# EAGLE board SMPS GACUN - Copy (EAGLE 9.5.0), part 1 of 2
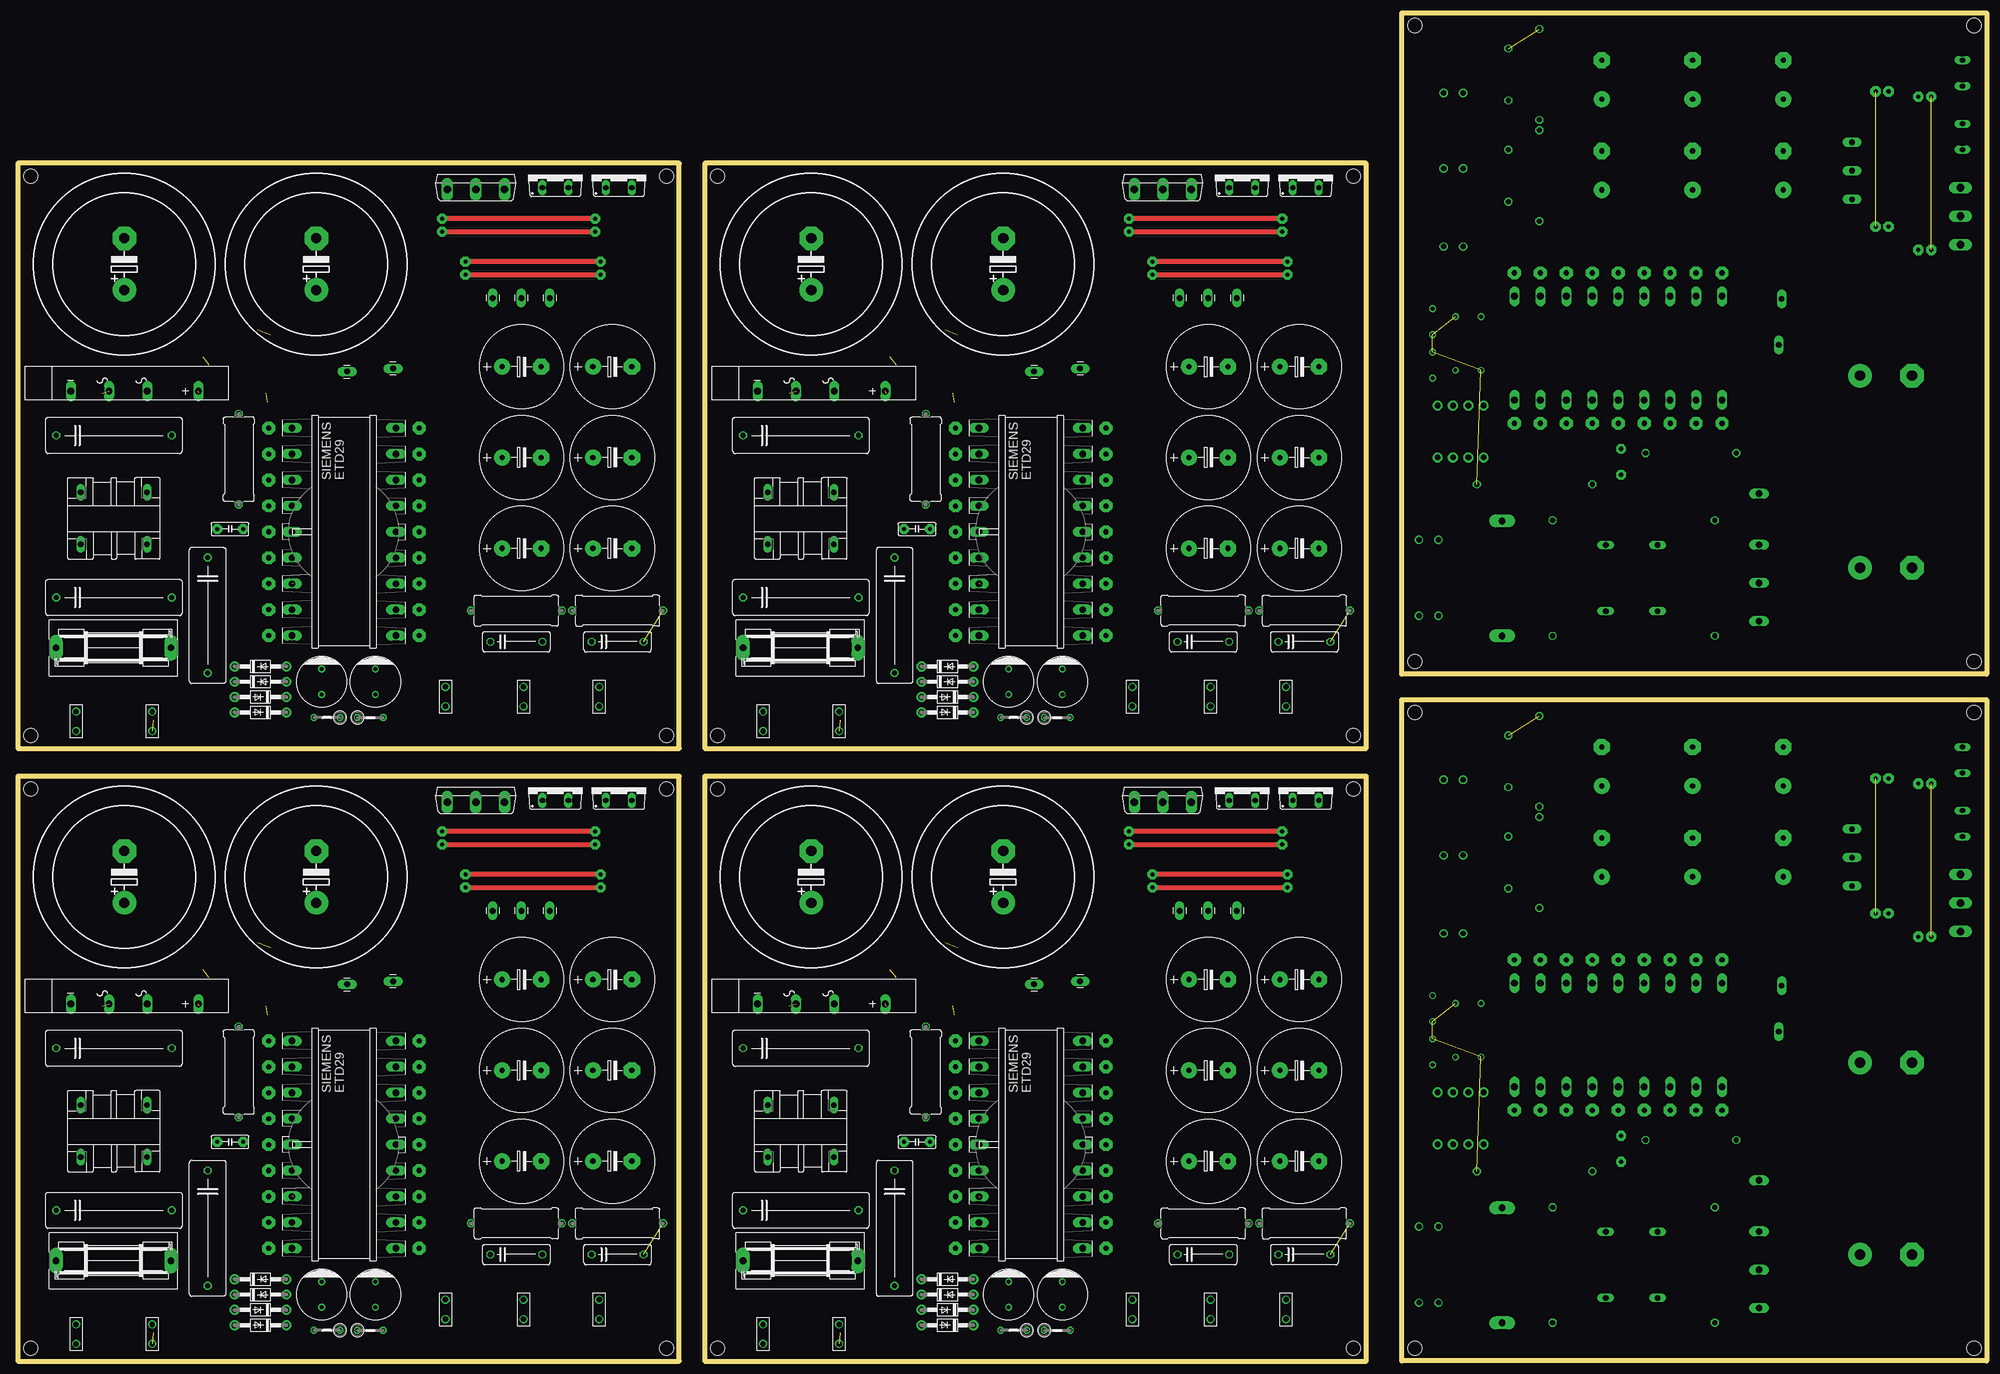
[diagram p0: board, top side]
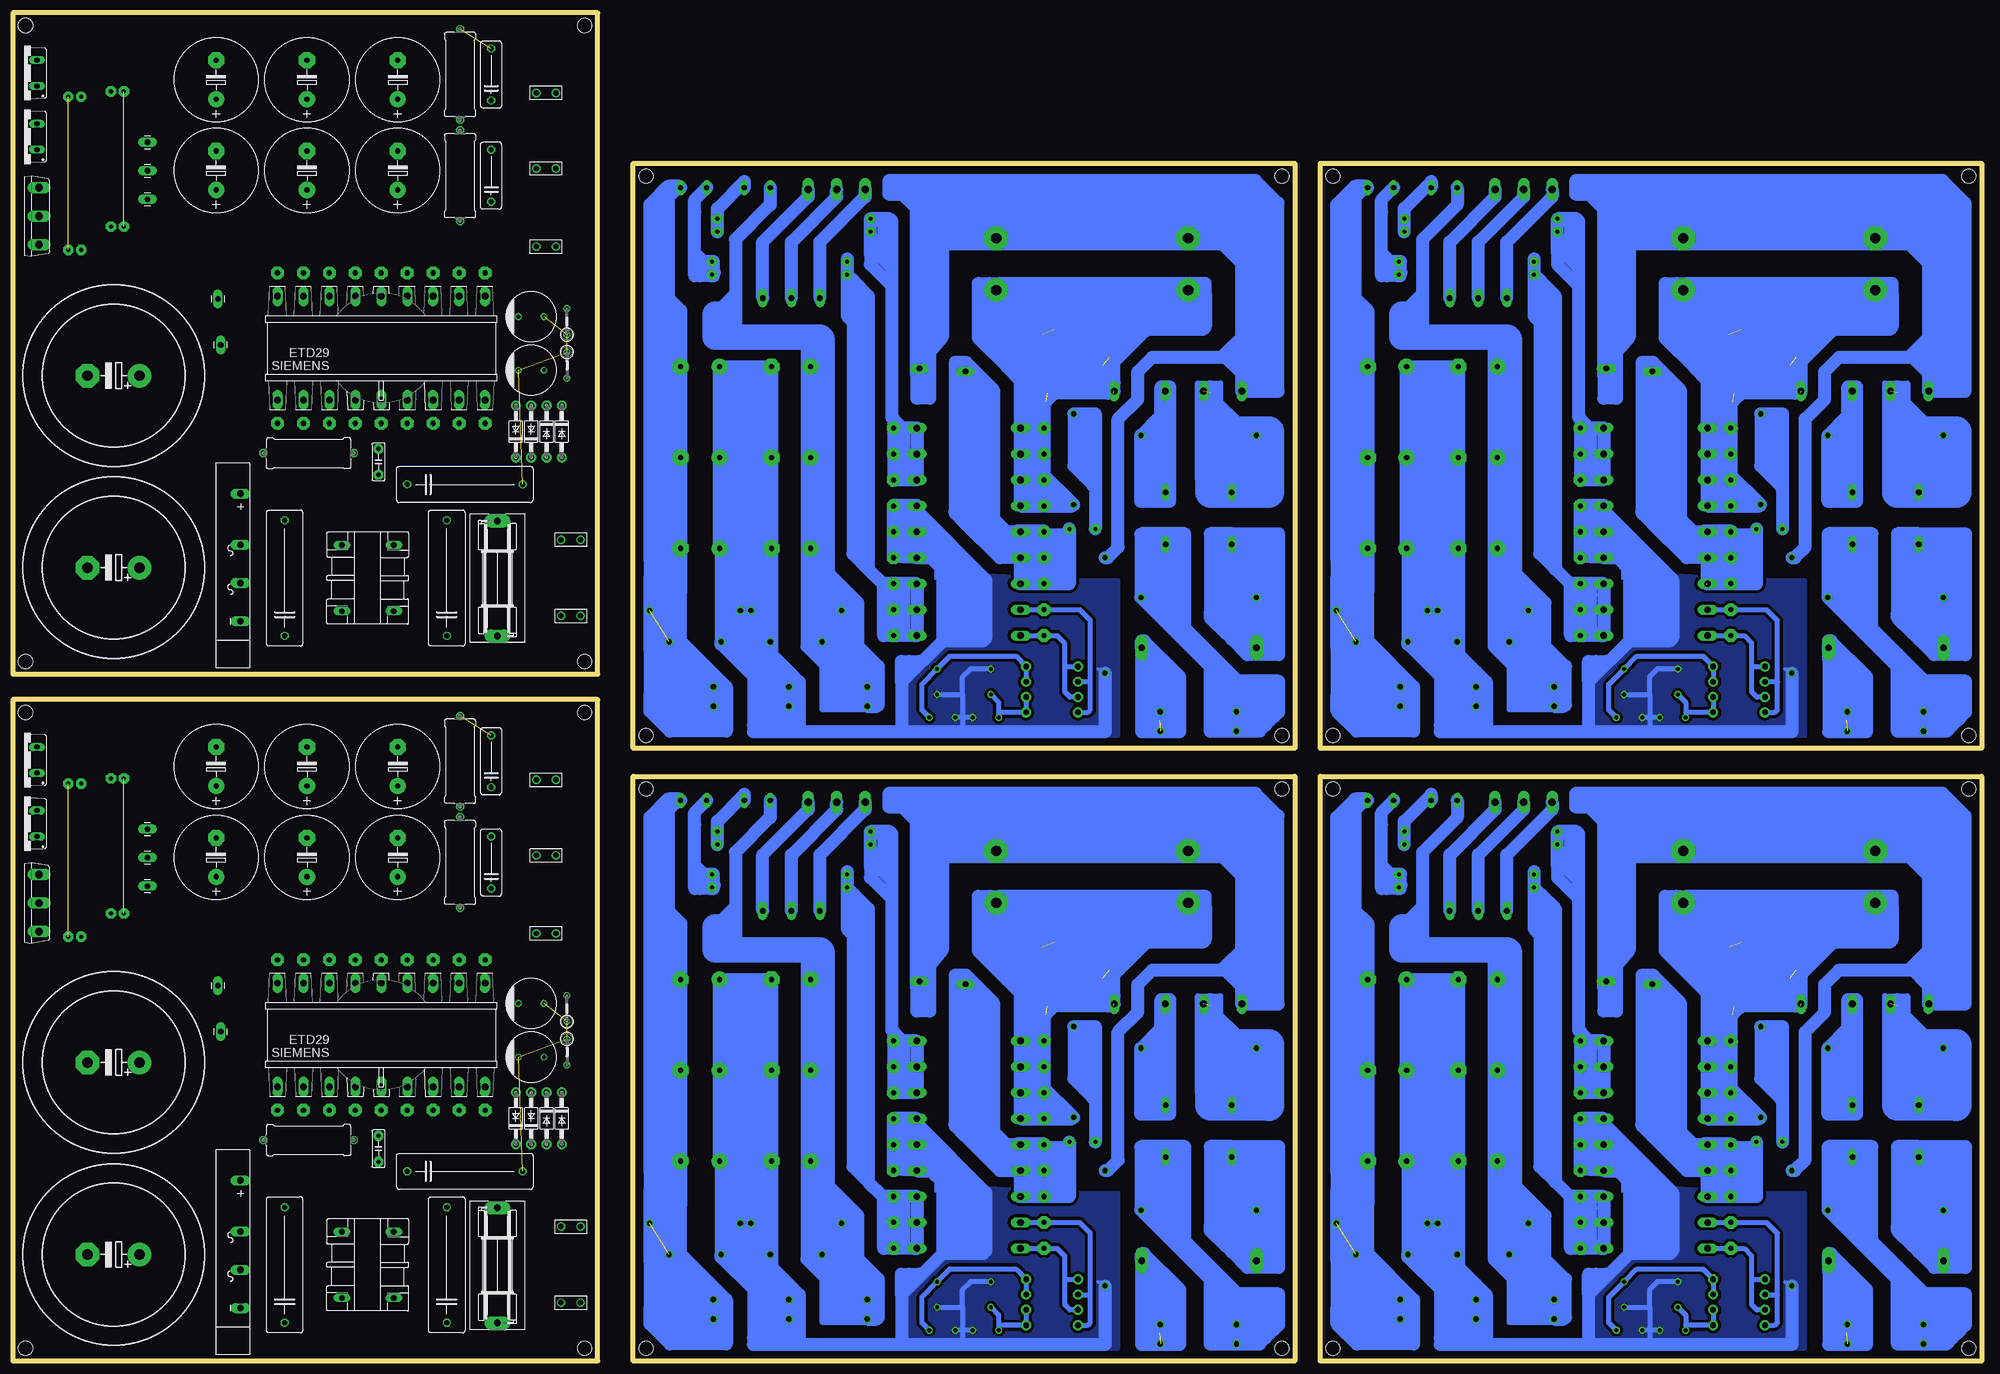
[diagram p1: board, bottom side, seen from below]

Size 385.5 x 264.05 mm. Coordinates in mm from the lower left corner, seen from the top.
Outline: 0,0 129.5,0 129.5,114.55 0,114.55 0,0
Outline: 134.5,0 264,0 264,114.55 134.5,114.55 134.5,0
Outline: 0,120 129.5,120 129.5,234.55 0,234.55 0,120
Outline: 134.5,120 264,120 264,234.55 134.5,234.55 134.5,120
Outline: 270.95,0.05 270.95,129.55 385.5,129.55 385.5,0.05 270.95,0.05
Outline: 270.95,134.55 270.95,264.05 385.5,264.05 385.5,134.55 270.95,134.55
Copper layers (1*16): Top 0.035mm / dielectric 1.5mm / Bottom 0.035mm
Design rules "default": minimum track width 6mil, minimum drill 0.35mm, track to track 24mil, track to pad 24mil, pad to pad 24mil, via to via 24mil, smd to smd 24mil, copper to edge 40mil, drill to drill 6mil, minimum pad ring 10mil, minimum via ring 8mil, stop-mask expansion 4mil, vias tented up to drill 0mil, thermal gap 10mil
Holes 2.8 mm at 127,2.55 127,112.05 2.5,112.05 2.5,2.55 261.5,2.55 261.5,112.05 137,112.05 137,2.55 127,122.55 127,232.05 2.5,232.05 2.5,122.55 261.5,122.55 261.5,232.05 137,232.05 137,122.55 383,127.05 273.5,127.05 273.5,2.55 383,2.55 383,261.55 273.5,261.55 273.5,137.05 383,137.05

## Footprints (pad centres in the part's own frame; a part is rotated, then mirrored left to right if it is on the bottom)
DSI32 = drill 1.321 long: + -14,1.5; - 10.994,1.5; AC1 -3.992,1.5; AC2 3.501,1.5
C225-074X268 = drill 1.016 octagon: 1 -11.303,0; 2 11.303,0
EB35D = drill 2.007 pad 4.597: + -5.08,0 | drill 2.007 pad 4.597 octagon: - 5.08,0
C050-025X075 = drill 0.813 pad 1.93 octagon: 1 -2.54,0; 2 2.54,0
E7,5-16 = drill 1.016 pad 3.15: + -3.81,0 | drill 1.016 pad 3.15 octagon: - 3.81,0
C102-043X133 = drill 1.016 octagon: 1 -5.08,0; 2 5.08,0
SANYO-OSCON_F13 = drill 0.8 pad 1.27: + 2.5,0; - -2.5,0
TO220ACS = drill 1.016 long: A 2.54,-2.54; C -2.54,-2.54
DO41-10 = drill 1.118 pad 1.93: A 5.08,0; C -5.08,0
SH22,5A = drill 1.321 pad 2.54 long: 1 -11.252,0; 2 11.252,0
1X01_LONGPAD = drill 1.118 pad 1.88 long: 1 0,0
1X02_BIG = drill 1.067: P$1 0,0; P$2 3.81,0
MFE = drill 1.118 long: 1 6.477,-5.08; 2 6.477,5.08; 3 -6.477,5.08; 4 -6.477,-5.08
ST-D4 = drill 1.321 long: 1 -15.24,10.16; 2 -15.24,-10.16; 3 -20.32,10.16; 4 -10.16,-10.16; 5 -5.08,10.16; 6 -25.4,10.16; 7 -20.32,-10.16; 8 -25.4,-10.16; 10 5.08,-10.16; 11 10.16,10.16; 12 10.16,-10.16; 13 15.24,10.16; 14 15.24,-10.16 | drill 1.321 pad 1.981 long: P$1 -10.16,10.16; P$2 0,10.16; P$3 5.08,10.16; P$4 0,-10.16; P$5 -5.08,-10.16
TO247BV = drill 1.499 long: D 0,-2.921; G -5.588,-2.921; S 5.588,-2.921
0617/17 = drill 1.016 octagon: 1 -8.89,0; 2 8.89,0
0207/5V = drill 0.813 octagon: 1 -2.54,0; 2 2.54,0

## Placement (x,y rotation side)
B1  RECTIFIER-DSI32  [DSI32]  21.34,71.45 180 top
B2  RECTIFIER-DSI32  [DSI32]  155.84,71.45 180 top
B3  RECTIFIER-DSI32  [DSI32]  21.34,191.45 180 top
B4  RECTIFIER-DSI32  [DSI32]  155.84,191.45 180 top
B5  RECTIFIER-DSI32  [DSI32]  342.4,21.39 270 bottom
B6  RECTIFIER-DSI32  [DSI32]  342.4,155.89 270 bottom
C1  [C225-074X268]  18.8,29.56 0 top
C2  [C225-074X268]  18.8,61.29 0 top
C3  [EB35D]  58.43,94.82 90 top
C4  [C050-025X075]  41.56,42.95 0 top
C5  [C225-074X268]  37.14,26.04 270 top
C6  [E7,5-16]  98.62,39.17 0 top
C7  [E7,5-16]  116.4,39.17 0 top
C8  [E7,5-16]  98.62,74.73 0 top
C9  [E7,5-16]  116.4,74.73 0 top
C10  [E7,5-16]  98.62,56.95 0 top
C11  [E7,5-16]  116.4,56.95 0 top
C12  [C102-043X133]  97.61,20.88 0 top
C13  [C102-043X133]  117.42,20.88 0 top
C14  [EB35D]  20.84,94.82 90 top
C15  [SANYO-OSCON_F13]  59.5,13.05 270 top
C16  [SANYO-OSCON_F13]  70,13.05 270 top
C17  [C225-074X268]  153.3,29.56 0 top
C18  [E7,5-16]  233.12,56.95 0 top
C19  [E7,5-16]  250.9,56.95 0 top
C20  [C102-043X133]  232.11,20.88 0 top
C21  [C102-043X133]  251.92,20.88 0 top
C22  [EB35D]  155.34,94.82 90 top
C23  [C225-074X268]  153.3,61.29 0 top
C24  [EB35D]  192.93,94.82 90 top
C25  [C050-025X075]  176.06,42.95 0 top
C26  [C225-074X268]  171.64,26.04 270 top
C27  [E7,5-16]  233.12,39.17 0 top
C28  [E7,5-16]  250.9,39.17 0 top
C29  [E7,5-16]  233.12,74.73 0 top
C30  [E7,5-16]  250.9,74.73 0 top
C31  [SANYO-OSCON_F13]  194,13.05 270 top
C32  [SANYO-OSCON_F13]  204.5,13.05 270 top
C33  [C225-074X268]  18.8,149.56 0 top
C34  [E7,5-16]  98.62,176.95 0 top
C35  [E7,5-16]  116.4,176.95 0 top
C36  [C102-043X133]  97.61,140.88 0 top
C37  [C102-043X133]  117.42,140.88 0 top
C38  [EB35D]  20.84,214.82 90 top
C39  [C225-074X268]  18.8,181.29 0 top
C40  [EB35D]  58.43,214.82 90 top
C41  [C050-025X075]  41.56,162.95 0 top
C42  [C225-074X268]  37.14,146.04 270 top
C43  [E7,5-16]  98.62,159.17 0 top
C44  [E7,5-16]  116.4,159.17 0 top
C45  [E7,5-16]  98.62,194.73 0 top
C46  [E7,5-16]  116.4,194.73 0 top
C47  [SANYO-OSCON_F13]  59.5,133.05 270 top
C48  [SANYO-OSCON_F13]  70,133.05 270 top
C49  [C225-074X268]  153.3,149.56 0 top
C50  [E7,5-16]  233.12,176.95 0 top
C51  [E7,5-16]  250.9,176.95 0 top
C52  [C102-043X133]  232.11,140.88 0 top
C53  [C102-043X133]  251.92,140.88 0 top
C54  [EB35D]  155.34,214.82 90 top
C55  [C225-074X268]  153.3,181.29 0 top
C56  [EB35D]  192.93,214.82 90 top
C57  [C050-025X075]  176.06,162.95 0 top
C58  [C225-074X268]  171.64,146.04 270 top
C59  [E7,5-16]  233.12,159.17 0 top
C60  [E7,5-16]  250.9,159.17 0 top
C61  [E7,5-16]  233.12,194.73 0 top
C62  [E7,5-16]  250.9,194.73 0 top
C63  [SANYO-OSCON_F13]  194,133.05 270 top
C64  [SANYO-OSCON_F13]  204.5,133.05 270 top
C65  [C225-074X268]  300.51,18.85 90 bottom
C66  [E7,5-16]  327.9,98.67 90 bottom
C67  [E7,5-16]  327.9,116.45 90 bottom
C68  [C102-043X133]  291.83,97.66 90 bottom
C69  [C102-043X133]  291.83,117.47 90 bottom
C70  [EB35D]  365.77,20.89 180 bottom
C71  [C225-074X268]  332.24,18.85 90 bottom
C72  [EB35D]  365.77,58.48 180 bottom
C73  [C050-025X075]  313.9,41.61 90 bottom
C74  [C225-074X268]  296.99,37.19 0 bottom
C75  [E7,5-16]  310.12,98.67 90 bottom
C76  [E7,5-16]  310.12,116.45 90 bottom
C77  [E7,5-16]  345.68,98.67 90 bottom
C78  [E7,5-16]  345.68,116.45 90 bottom
C79  [SANYO-OSCON_F13]  284,59.55 0 bottom
C80  [SANYO-OSCON_F13]  284,70.05 0 bottom
C81  [C225-074X268]  300.51,153.35 90 bottom
C82  [E7,5-16]  327.9,233.17 90 bottom
C83  [E7,5-16]  327.9,250.95 90 bottom
C84  [C102-043X133]  291.83,232.16 90 bottom
C85  [C102-043X133]  291.83,251.97 90 bottom
C86  [EB35D]  365.77,155.39 180 bottom
C87  [C225-074X268]  332.24,153.35 90 bottom
C88  [EB35D]  365.77,192.98 180 bottom
C89  [C050-025X075]  313.9,176.11 90 bottom
C90  [C225-074X268]  296.99,171.69 0 bottom
C91  [E7,5-16]  310.12,233.17 90 bottom
C92  [E7,5-16]  310.12,250.95 90 bottom
C93  [E7,5-16]  345.68,233.17 90 bottom
C94  [E7,5-16]  345.68,250.95 90 bottom
C95  [SANYO-OSCON_F13]  284,194.05 0 bottom
C96  [SANYO-OSCON_F13]  284,204.55 0 bottom
D1  BYT08P  [TO220ACS]  105.23,112.35 0 top
D2  BYT08P  [TO220ACS]  117.67,112.35 0 top
D3  1N4004  [DO41-10]  47.5,16.05 0 top
D4  1N4004  [DO41-10]  47.5,10.05 180 top
D5  1N4004  [DO41-10]  47.5,7.05 180 top
D6  1N4004  [DO41-10]  47.5,13.05 0 top
D7  BYT08P  [TO220ACS]  239.73,112.35 0 top
D8  BYT08P  [TO220ACS]  252.17,112.35 0 top
D9  1N4004  [DO41-10]  182,16.05 0 top
D10  1N4004  [DO41-10]  182,10.05 180 top
D11  1N4004  [DO41-10]  182,7.05 180 top
D12  1N4004  [DO41-10]  182,13.05 0 top
D13  BYT08P  [TO220ACS]  105.23,232.35 0 top
D14  BYT08P  [TO220ACS]  117.67,232.35 0 top
D15  1N4004  [DO41-10]  47.5,136.05 0 top
D16  1N4004  [DO41-10]  47.5,130.05 180 top
D17  1N4004  [DO41-10]  47.5,127.05 180 top
D18  1N4004  [DO41-10]  47.5,133.05 0 top
D19  BYT08P  [TO220ACS]  239.73,232.35 0 top
D20  BYT08P  [TO220ACS]  252.17,232.35 0 top
D21  1N4004  [DO41-10]  182,136.05 0 top
D22  1N4004  [DO41-10]  182,130.05 180 top
D23  1N4004  [DO41-10]  182,127.05 180 top
D24  1N4004  [DO41-10]  182,133.05 0 top
D25  BYT08P  [TO220ACS]  383.3,105.28 90 bottom
D26  BYT08P  [TO220ACS]  383.3,117.72 90 bottom
D27  1N4004  [DO41-10]  287,47.55 90 bottom
D28  1N4004  [DO41-10]  281,47.55 270 bottom
D29  1N4004  [DO41-10]  278,47.55 270 bottom
D30  1N4004  [DO41-10]  284,47.55 90 bottom
D31  BYT08P  [TO220ACS]  383.3,239.78 90 bottom
D32  BYT08P  [TO220ACS]  383.3,252.22 90 bottom
D33  1N4004  [DO41-10]  287,182.05 90 bottom
D34  1N4004  [DO41-10]  281,182.05 270 bottom
D35  1N4004  [DO41-10]  278,182.05 270 bottom
D36  1N4004  [DO41-10]  284,182.05 90 bottom
F1  [SH22,5A]  18.72,19.68 180 top
F2  [SH22,5A]  153.22,19.68 180 top
F3  [SH22,5A]  18.72,139.68 180 top
F4  [SH22,5A]  153.22,139.68 180 top
F5  [SH22,5A]  290.63,18.77 270 bottom
F6  [SH22,5A]  290.63,153.27 270 bottom
J1  [1X01_LONGPAD]  73.47,74.39 270 top
J2  [1X02_BIG]  11.41,3.39 90 top
J3  [1X02_BIG]  83.72,8.22 90 top
J4  [1X02_BIG]  26.3,3.39 90 top
J5  [1X01_LONGPAD]  64.47,73.82 90 top
J6  [1X01_LONGPAD]  104.15,88.19 0 top
J7  [1X01_LONGPAD]  92.97,88.19 0 top
J8  [1X01_LONGPAD]  98.56,88.19 0 top
J9  [1X02_BIG]  99.01,8.22 90 top
J10  [1X02_BIG]  113.81,8.22 90 top
J11  [1X02_BIG]  145.91,3.39 90 top
J12  [1X02_BIG]  160.8,3.39 90 top
J13  [1X01_LONGPAD]  207.97,74.39 270 top
J14  [1X01_LONGPAD]  198.97,73.82 90 top
J15  [1X01_LONGPAD]  238.65,88.19 0 top
J16  [1X01_LONGPAD]  227.47,88.19 0 top
J17  [1X01_LONGPAD]  233.06,88.19 0 top
J18  [1X02_BIG]  218.22,8.22 90 top
J19  [1X02_BIG]  233.51,8.22 90 top
J20  [1X02_BIG]  248.31,8.22 90 top
J21  [1X02_BIG]  11.41,123.39 90 top
J22  [1X02_BIG]  26.3,123.39 90 top
J23  [1X01_LONGPAD]  73.47,194.39 270 top
J24  [1X01_LONGPAD]  64.47,193.82 90 top
J25  [1X01_LONGPAD]  104.15,208.19 0 top
J26  [1X01_LONGPAD]  92.97,208.19 0 top
J27  [1X01_LONGPAD]  98.56,208.19 0 top
J28  [1X02_BIG]  83.72,128.22 90 top
J29  [1X02_BIG]  99.01,128.22 90 top
J30  [1X02_BIG]  113.81,128.22 90 top
J31  [1X02_BIG]  145.91,123.39 90 top
J32  [1X02_BIG]  160.8,123.39 90 top
J33  [1X01_LONGPAD]  207.97,194.39 270 top
J34  [1X01_LONGPAD]  198.97,193.82 90 top
J35  [1X01_LONGPAD]  238.65,208.19 0 top
J36  [1X01_LONGPAD]  227.47,208.19 0 top
J37  [1X01_LONGPAD]  233.06,208.19 0 top
J38  [1X02_BIG]  218.22,128.22 90 top
J39  [1X02_BIG]  233.51,128.22 90 top
J40  [1X02_BIG]  248.31,128.22 90 top
J41  [1X02_BIG]  274.34,11.46 180 bottom
J42  [1X02_BIG]  274.34,26.35 180 bottom
J43  [1X01_LONGPAD]  345.34,73.52 0 bottom
J44  [1X01_LONGPAD]  344.77,64.52 180 bottom
J45  [1X01_LONGPAD]  359.14,104.2 90 bottom
J46  [1X01_LONGPAD]  359.14,93.02 90 bottom
J47  [1X01_LONGPAD]  359.14,98.61 90 bottom
J48  [1X02_BIG]  279.17,83.77 180 bottom
J49  [1X02_BIG]  279.17,99.06 180 bottom
J50  [1X02_BIG]  279.17,113.86 180 bottom
J51  [1X02_BIG]  274.34,145.96 180 bottom
J52  [1X02_BIG]  274.34,160.85 180 bottom
J53  [1X01_LONGPAD]  345.34,208.02 0 bottom
J54  [1X01_LONGPAD]  344.77,199.02 180 bottom
J55  [1X01_LONGPAD]  359.14,238.7 90 bottom
J56  [1X01_LONGPAD]  359.14,227.52 90 bottom
J57  [1X01_LONGPAD]  359.14,233.11 90 bottom
J58  [1X02_BIG]  279.17,218.27 180 bottom
J59  [1X02_BIG]  279.17,233.56 180 bottom
J60  [1X02_BIG]  279.17,248.36 180 bottom
L1  MFE  [MFE]  18.8,45.05 0 top
L2  [ST-D4]  63.83,47.48 90 top
L3  MFE  [MFE]  153.3,45.05 0 top
L4  [ST-D4]  198.33,47.48 90 top
L5  MFE  [MFE]  18.8,165.05 0 top
L6  [ST-D4]  63.83,167.48 90 top
L7  MFE  [MFE]  153.3,165.05 0 top
L8  [ST-D4]  198.33,167.48 90 top
L9  MFE  [MFE]  316,18.85 90 bottom
L10  [ST-D4]  318.43,63.88 180 bottom
L11  MFE  [MFE]  316,153.35 90 bottom
L12  [ST-D4]  318.43,198.38 180 bottom
Q1  IRFPC40  [TO247BV]  89.67,112.35 0 top
Q2  IRFPC40  [TO247BV]  224.17,112.35 0 top
Q3  IRFPC40  [TO247BV]  89.67,232.35 0 top
Q4  IRFPC40  [TO247BV]  224.17,232.35 0 top
Q5  IRFPC40  [TO247BV]  383.3,89.72 90 bottom
Q6  IRFPC40  [TO247BV]  383.3,224.22 90 bottom
R1  [0617/17]  43.26,56.63 90 top
R2  [0617/17]  97.61,26.98 0 top
R3  [0617/17]  117.42,26.98 0 top
R4  [0207/5V]  60.5,6.05 180 top
R5  [0207/5V]  69,6.05 0 top
R6  [0617/17]  177.76,56.63 90 top
R7  [0617/17]  232.11,26.98 0 top
R8  [0617/17]  251.92,26.98 0 top
R9  [0207/5V]  195,6.05 180 top
R10  [0207/5V]  203.5,6.05 0 top
R11  [0617/17]  43.26,176.63 90 top
R12  [0617/17]  97.61,146.98 0 top
R13  [0617/17]  117.42,146.98 0 top
R14  [0207/5V]  60.5,126.05 180 top
R15  [0207/5V]  69,126.05 0 top
R16  [0617/17]  177.76,176.63 90 top
R17  [0617/17]  232.11,146.98 0 top
R18  [0617/17]  251.92,146.98 0 top
R19  [0207/5V]  195,126.05 180 top
R20  [0207/5V]  203.5,126.05 0 top
R21  [0617/17]  327.58,43.31 180 bottom
R22  [0617/17]  297.93,97.66 90 bottom
R23  [0617/17]  297.93,117.47 90 bottom
R24  [0207/5V]  277,60.55 270 bottom
R25  [0207/5V]  277,69.05 90 bottom
R26  [0617/17]  327.58,177.81 180 bottom
R27  [0617/17]  297.93,232.16 90 bottom
R28  [0617/17]  297.93,251.97 90 bottom
R29  [0207/5V]  277,195.05 270 bottom
R30  [0207/5V]  277,203.55 90 bottom

## Library data of the parts
B1-B6 = rectifier
C1-C96 = rcl; SPICEPREFIX: C
D1-D36 = diode
F1-F6 = fuse; MPN: 0031.7701.11; OC_FARNELL: unknown; OC_NEWARK: 04F1224
J1-J60 = SparkFun-Connectors
L1 L3 L5 L7 L9 L11 = inductors
L2 L4 L6 L8 L10 L12 = trafo-siemens
Q1-Q6 = transistor-power
R1-R3 R6-R8 R11-R13 R16-R18 R21-R23 R26-R28 = rcl; SPICEPREFIX: R
R4 R5 R9 R10 R14 R15 R19 R20 R24 R25 R29 R30 = resistor

## Nets
GND: C5.2 C6.- C7.+ C8.- C9.+ C10.- C11.+ C12.2 C13.1 C15.- C16.+ J9.P$1 J9.P$2 L2.4 L2.P$4 L2.P$5 R2.2 R3.1 R4.1 R5.1
GND1: C18.- C19.+ C20.2 C21.1 C26.2 C27.- C28.+ C29.- C30.+ C31.- C32.+ J19.P$1 J19.P$2 L4.4 L4.P$4 L4.P$5 R7.2 R8.1 R9.1 R10.1
GND2: C34.- C35.+ C36.2 C37.1 C42.2 C43.- C44.+ C45.- C46.+ C47.- C48.+ J29.P$1 J29.P$2 L6.4 L6.P$4 L6.P$5 R12.2 R13.1 R14.1 R15.1
GND3: C50.- C51.+ C52.2 C53.1 C58.2 C59.- C60.+ C61.- C62.+ C63.- C64.+ J39.P$1 J39.P$2 L8.4 L8.P$4 L8.P$5 R17.2 R18.1 R19.1 R20.1
GND4: C74.2 C79.- C80.+ R24.1 R25.1
GND5: C90.2 C95.- C96.+ R29.1 R30.1
N$1: C1.1 F1.2 L1.4
N$2: B1.AC2 C2.1 L1.3
N$3: C1.2 J2.P$1 J2.P$2 L1.1
N$4: B1.AC1 C2.2 L1.2
N$5: C4.2 J5.1 L2.1 L2.5 L2.P$1
N$6: B1.- C3.- C5.1 C14.- J1.1
N$7: C4.1 R1.2
N$8: F1.1 J4.P$1 J4.P$2
N$9: J6.1 Q1.S
N$10: C6.+ C8.+ C10.+ C12.1 D1.C J3.P$1 J3.P$2 R2.1
N$11: J7.1 Q1.G
N$13: D2.C L2.2 L2.7 L2.8
N$14: J8.1 Q1.D
N$15: B1.+ C3.+ C14.+ L2.11 L2.13 L2.P$2 L2.P$3 R1.1
N$17: C7.- C9.- C11.- C13.2 D2.A J10.P$1 J10.P$2 R3.2
N$25: D1.A L2.10 L2.12 L2.14
N$35: D5.A D6.C L2.3
N$37: C17.1 F2.2 L3.4
N$38: B2.AC2 C23.1 L3.3
N$39: C15.+ D4.C D5.C R4.2
N$40: C16.- D3.A D6.A R5.2
N$41: D3.C D4.A L2.6
N$42: C17.2 J11.P$1 J11.P$2 L3.1
N$43: B2.AC1 C23.2 L3.2
N$44: C25.2 J14.1 L4.1 L4.5 L4.P$1
N$45: B2.- C22.- C24.- C26.1 J13.1
N$46: C25.1 R6.2
N$47: C18.+ C20.1 C27.+ C29.+ D7.C J18.P$1 J18.P$2 R7.1
N$48: D8.C L4.2 L4.7 L4.8
N$49: D7.A L4.10 L4.12 L4.14
N$50: F2.1 J12.P$1 J12.P$2
N$51: B2.+ C22.+ C24.+ L4.11 L4.13 L4.P$2 L4.P$3 R6.1
N$52: J15.1 Q2.S
N$53: J16.1 Q2.G
N$54: J17.1 Q2.D
N$55: C19.- C21.2 C28.- C30.- D8.A J20.P$1 J20.P$2 R8.2
N$75: D11.A D12.C L4.3
N$76: C31.+ D10.C D11.C R9.2
N$77: C32.- D9.A D12.A R10.2
N$78: D9.C D10.A L4.6
N$79: C33.1 F3.2 L5.4
N$80: B3.AC2 C39.1 L5.3
N$81: C33.2 J21.P$1 J21.P$2 L5.1
N$82: B3.AC1 C39.2 L5.2
N$83: C41.2 J24.1 L6.1 L6.5 L6.P$1
N$84: B3.- C38.- C40.- C42.1 J23.1
N$85: C41.1 R11.2
N$86: C34.+ C36.1 C43.+ C45.+ D13.C J28.P$1 J28.P$2 R12.1
N$87: D14.C L6.2 L6.7 L6.8
N$88: D13.A L6.10 L6.12 L6.14
N$89: F3.1 J22.P$1 J22.P$2
N$90: B3.+ C38.+ C40.+ L6.11 L6.13 L6.P$2 L6.P$3 R11.1
N$91: J25.1 Q3.S
N$92: J26.1 Q3.G
N$93: J27.1 Q3.D
N$94: C35.- C37.2 C44.- C46.- D14.A J30.P$1 J30.P$2 R13.2
N$114: D17.A D18.C L6.3
N$115: C47.+ D16.C D17.C R14.2
N$116: C48.- D15.A D18.A R15.2
N$117: D15.C D16.A L6.6
N$118: C49.1 F4.2 L7.4
N$119: B4.AC2 C55.1 L7.3
N$120: C49.2 J31.P$1 J31.P$2 L7.1
N$121: B4.AC1 C55.2 L7.2
N$122: C57.2 J34.1 L8.1 L8.5 L8.P$1
N$123: B4.- C54.- C56.- C58.1 J33.1
N$124: C57.1 R16.2
N$125: C50.+ C52.1 C59.+ C61.+ D19.C J38.P$1 J38.P$2 R17.1
N$126: D20.C L8.2 L8.7 L8.8
N$127: D19.A L8.10 L8.12 L8.14
N$128: F4.1 J32.P$1 J32.P$2
N$129: B4.+ C54.+ C56.+ L8.11 L8.13 L8.P$2 L8.P$3 R16.1
N$130: J35.1 Q4.S
N$131: J36.1 Q4.G
N$132: J37.1 Q4.D
N$133: C51.- C53.2 C60.- C62.- D20.A J40.P$1 J40.P$2 R18.2
N$153: D23.A D24.C L8.3
N$154: C63.+ D22.C D23.C R19.2
N$155: C64.- D21.A D24.A R20.2
N$156: D21.C D22.A L8.6
N$158: B5.AC2
N$167: J42.P$1
N$197: B6.AC2
N$206: J52.P$1
S$15: L10.1
S$61: B5.+
S$67: C69.2 R23.2
S$101: L12.1
S$147: B6.+
S$153: C85.2 R28.2

## Tracks (layer width: path | path; a pad name or v marks a point on that pad's centre or on a via)
GND
  Bottom 0.61: C5.2 38.49,15.45 38.58,15.54 38.58,15.55 37.5,15.55
  Bottom 1.016: R4.1 65,6.05 | 65,6.05 R5.1 | 65,6.05 65,3.28 | C15.- 63.5,15.55 65,14.05 65,10.55 | C16.+ 65,10.55 | 65,10.55 65,6.05
  Bottom 2.54: C6.- 108.53,39.17 | 108.53,39.17 C7.+ | C7.+ C11.+ C9.+ C8.- C10.- C6.- | 108.53,39.17 R3.1 R2.2 106.5,20.88 | C12.2 106.5,20.88 | 106.5,20.88 108.53,20.88 | 108.53,20.88 C13.1 | J9.P$2 J9.P$1 99.01,3.28 | J9.P$2 99.68,12.03 108.53,20.88 | C5.2 37.14,3.28 65,3.28 76.73,3.28 | 99.01,3.28 76.73,3.28 | 69,21.05 69,35.05 71.27,37.32 L2.4 L2.P$5 L2.P$4 73.99,46.54 60.5,33.05 60.5,21.55 61,21.05 69,21.05 | 69,21.05 77,13.05 | 77,13.05 77,3.55 76.73,3.28 | C6.- 102.43,18.45 99.01,15.03 | J9.P$2 99.01,15.03 | C7.+ 112.34,38.92 C13.1 | C13.1 112.34,20.39 106,14.05 106,3.28 99.01,3.28 | 99.01,15.03 97,13.02 97,4.55 106,4.55 | 77,13.05 77,17.05 75.5,17.05 | 75.5,17.05 73.5,17.05 | 75.5,17.05 75.5,16.05
  pour Bottom: 76.5,3.55 76.5,14.55 66,23.55 60,34.05 44,33.05 34.5,33.05 34.5,4.05 34.5,2.37 37.09,2.37 76.5,2.37
GND1
  Bottom 0.61: C26.2 172.99,15.45 173.08,15.54 173.08,15.55 172,15.55
  Bottom 1.016: R9.1 199.5,6.05 | 199.5,6.05 R10.1 | 199.5,6.05 199.5,3.28 | C31.- 198,15.55 199.5,14.05 199.5,10.55 | C32.+ 199.5,10.55 | 199.5,10.55 199.5,6.05
  Bottom 2.54: C27.- 243.03,39.17 | 243.03,39.17 C28.+ | C28.+ C19.+ C30.+ C29.- C18.- C27.- | 243.03,39.17 R8.1 R7.2 241,20.88 | C20.2 241,20.88 | 241,20.88 243.03,20.88 | 243.03,20.88 C21.1 | J19.P$2 J19.P$1 233.51,3.28 | J19.P$2 234.18,12.03 243.03,20.88 | C26.2 171.64,3.28 199.5,3.28 211.23,3.28 | 233.51,3.28 211.23,3.28 | 203.5,21.05 203.5,35.05 205.77,37.32 L4.4 L4.P$5 L4.P$4 208.49,46.54 195,33.05 195,21.55 195.5,21.05 203.5,21.05 | 203.5,21.05 211.5,13.05 | 211.5,13.05 211.5,3.55 211.23,3.28 | C27.- 236.93,18.45 233.51,15.03 | J19.P$2 233.51,15.03 | C28.+ 246.84,38.92 C21.1 | C21.1 246.84,20.39 240.5,14.05 240.5,3.28 233.51,3.28 | 233.51,15.03 231.5,13.02 231.5,4.55 240.5,4.55 | 211.5,13.05 211.5,17.05 210,17.05 | 210,17.05 208,17.05 | 210,17.05 210,16.05
  pour Bottom: 211,3.55 211,14.55 200.5,23.55 194.5,34.05 178.5,33.05 169,33.05 169,4.05 169,2.37 171.59,2.37 211,2.37
GND2
  Bottom 0.61: C42.2 38.49,135.45 38.58,135.54 38.58,135.55 37.5,135.55
  Bottom 1.016: R14.1 65,126.05 | 65,126.05 R15.1 | 65,126.05 65,123.28 | C47.- 63.5,135.55 65,134.05 65,130.55 | C48.+ 65,130.55 | 65,130.55 65,126.05
  Bottom 2.54: C43.- 108.53,159.17 | 108.53,159.17 C44.+ | C44.+ C35.+ C46.+ C45.- C34.- C43.- | 108.53,159.17 R13.1 R12.2 106.5,140.88 | C36.2 106.5,140.88 | 106.5,140.88 108.53,140.88 | 108.53,140.88 C37.1 | J29.P$2 J29.P$1 99.01,123.28 | J29.P$2 99.68,132.03 108.53,140.88 | C42.2 37.14,123.28 65,123.28 76.73,123.28 | 99.01,123.28 76.73,123.28 | 69,141.05 69,155.05 71.27,157.32 L6.4 L6.P$5 L6.P$4 73.99,166.54 60.5,153.05 60.5,141.55 61,141.05 69,141.05 | 69,141.05 77,133.05 | 77,133.05 77,123.55 76.73,123.28 | C43.- 102.43,138.45 99.01,135.03 | J29.P$2 99.01,135.03 | C44.+ 112.34,158.92 C37.1 | C37.1 112.34,140.39 106,134.05 106,123.28 99.01,123.28 | 99.01,135.03 97,133.02 97,124.55 106,124.55 | 77,133.05 77,137.05 75.5,137.05 | 75.5,137.05 73.5,137.05 | 75.5,137.05 75.5,136.05
  pour Bottom: 76.5,123.55 76.5,134.55 66,143.55 60,154.05 44,153.05 34.5,153.05 34.5,124.05 34.5,122.37 37.09,122.37 76.5,122.37
GND3
  Bottom 0.61: C58.2 172.99,135.45 173.08,135.54 173.08,135.55 172,135.55
  Bottom 1.016: R19.1 199.5,126.05 | 199.5,126.05 R20.1 | 199.5,126.05 199.5,123.28 | C63.- 198,135.55 199.5,134.05 199.5,130.55 | C64.+ 199.5,130.55 | 199.5,130.55 199.5,126.05
  Bottom 2.54: C59.- 243.03,159.17 | 243.03,159.17 C60.+ | C60.+ C51.+ C62.+ C61.- C50.- C59.- | 243.03,159.17 R18.1 R17.2 241,140.88 | C52.2 241,140.88 | 241,140.88 243.03,140.88 | 243.03,140.88 C53.1 | J39.P$2 J39.P$1 233.51,123.28 | J39.P$2 234.18,132.03 243.03,140.88 | C58.2 171.64,123.28 199.5,123.28 211.23,123.28 | 233.51,123.28 211.23,123.28 | 203.5,141.05 203.5,155.05 205.77,157.32 L8.4 L8.P$5 L8.P$4 208.49,166.54 195,153.05 195,141.55 195.5,141.05 203.5,141.05 | 203.5,141.05 211.5,133.05 | 211.5,133.05 211.5,123.55 211.23,123.28 | C59.- 236.93,138.45 233.51,135.03 | J39.P$2 233.51,135.03 | C60.+ 246.84,158.92 C53.1 | C53.1 246.84,140.39 240.5,134.05 240.5,123.28 233.51,123.28 | 233.51,135.03 231.5,133.02 231.5,124.55 240.5,124.55 | 211.5,133.05 211.5,137.05 210,137.05 | 210,137.05 208,137.05 | 210,137.05 210,136.05
  pour Bottom: 211,123.55 211,134.55 200.5,143.55 194.5,154.05 178.5,153.05 169,153.05 169,124.05 169,122.37 171.59,122.37 211,122.37
GND4  (4 unrouted)
GND5  (4 unrouted)
N$1
  Bottom 2.54: 12.33,34.39 C1.1 7.47,29.53 F1.2 | L1.4 12.33,34.39 | 12.33,40.35 L1.4 | 12.33,34.39 12.33,22.55 | 12.33,22.55 12.33,21.38 | 12.33,21.38 9.32,18.37 3.18,18.37 3.18,42.05 12.33,42.05 | L1.4 12.33,42.05 | 12.33,42.05 16.5,42.05 16.5,26.55 | 12.33,21.38 13.5,22.55 | 16.5,26.55 13.5,23.55 13.5,22.55 | 12.33,22.55 13.5,22.55 | 13.5,22.55 16.5,25.55 16.5,26.55
N$2  (1 unrouted)
  Bottom 1.016: 16.52,50.07 19,52.56 19,71.55 14.5,71.55 14.5,68.05 11,64.55 10.5,64.55
  Bottom 2.54: L1.3 12.33,61.29 | 12.33,64.06 12.33,61.29 | C2.1 12.33,61.29 | B1.AC2 17.84,69.58 16.33,68.07
  Bottom 5: 16.52,50.07 17,50.56 17,57.05 | 16.5,61.55 16.5,69.55 | 12.33,61.29 12.33,62.88 15,65.55
  Bottom 6: 9.02,50.09 L1.3 16.52,50.07 | 9.02,50.09 5,50.05 5,62.05 14.66,62.05 | 9.02,50.09 10,58.05 16.5,61.55 13.5,53.05 16.5,51.55
N$3
  Bottom 2.54: J2.P$1 J2.P$2 11.41,13.46 16.5,18.55 | 25.41,29.56 C1.2 | L1.1 25.28,27.33 21.5,23.55 | 16.5,18.55 21.5,23.55 | J2.P$1 16.5,3.39 16.5,15.95 | 16.5,15.95 16.5,18.55 | J2.P$1 7,3.39 | 7,3.39 7,4.55 5.71,4.55 | 12.5,13.16 3.18,13.16 3.18,7.05 4,6.24 4.03,6.24 5.71,4.55 | C1.2 16.5,15.95 | C1.2 30.11,41.94 30,42.05 21.5,42.05 21.5,23.55 | 7,3.39 6.87,3.39 5.71,4.55
N$4
  Bottom 2.54: B1.AC1 25.34,66.06 | 25.34,66.06 25.34,61.55 | 25.34,61.55 25.34,50.18 L1.2 | C2.2 25.59,61.29 25.34,61.55 | C2.2 26.17,65.23 | 25.34,66.06 26.17,65.23 | 26.17,65.23 26.17,70.82 24.5,70.82 24.5,48.34 30.11,48.34 C2.2
N$5  (1 unrouted)
  Bottom 2.54: L2.P$1 57.74,37.32 64.47,44.06 | 64.29,75.5 64.29,73.5 64.47,73.69 J5.1 64.47,46.55 | 64.47,46.55 64.47,44.06 | C4.2 44.1,38.95 | 44.1,38.95 45.97,37.08 45.97,37.05 | L2.1 L2.P$1 | L2.P$1 46.51,37.32 46.23,37.05 | 44.1,38.95 44.1,32.21 53.87,32.21 | L2.5 59,42.4 59,45.05 | 64.29,75.5 59,70.22 59,45.05 | 64.29,75.5 64.29,75.55 66.5,75.55 66.5,46.55 | 66.5,46.55 64.47,46.55 | 64.47,44.06 64.51,44.06 66.5,46.05 66.5,46.55 | L2.5 L2.P$1 | L2.5 56.35,42.4 59,45.05
N$6
  Bottom 1.016: 74,108.55 74.5,109.05 | 10.35,81.55 14.5,77.4 14.5,77.04 | 14.5,76.55 14.5,76.54 | 11.11,77.04 12,77.93 | 11.62,79.55 11.62,79.43 12,79.05 12,77.93 | 12,77.93 12.5,78.43 12.5,78.55 | 10.35,73.55 13.84,77.04 14.5,77.04 | 14.5,77.04 14.5,76.55 | 14.5,76.55 11,73.05 10.35,73.05 | 12.61,77.04 12.11,76.54 11.62,76.05
  Bottom 2.54: 15.35,99.9 C14.- C3.- 69,99.9 | 10.35,76.28 10.35,73.55 10.35,73.05 B1.- 3.24,69.95 3.24,106.79 7.64,111.19 69,111.19 | 10.35,76.28 10.35,81.55 10.35,96.78 13.47,99.9 15.35,99.9 | 10.35,76.28 11.11,77.04 12.61,77.04 | 12.11,76.54 14.5,76.54 27.94,76.54 30.73,73.75 30.73,68.32 34.57,64.48 34.57,39.34 36.57,37.34 C5.1 | J1.1 73.47,98.58 72.14,99.9 | 72.14,99.9 69,99.9 | 70,108.55 72.14,106.41 72.14,99.9 | 69,99.9 69,96.55 | 69,96.55 69,80.55 71.5,77.55 71.5,73.05 | 74,73.05 71.5,73.05 | 74,73.05 74,108.55 | 74,109.05 71.86,111.19 | 74,109.05 73.38,108.43 73.38,107.83 | 73.38,101.43 73.38,105.05 | 73.38,105.05 73.38,107.83 | 73.38,107.83 72.66,108.55 | 71.38,109.33 71.66,109.05 72,109.05 72.12,108.93 72.28,108.93 72.66,108.55 | 69,111.19 71.86,111.19 | 69,96.55 71,97.05 72,97.55 71,92.05 71.5,79.55 | 69,96.55 71,95.05 71,95.67 | 15.35,99.9 8.5,93.05 | 69,111.19 70,110.19 70,110.05 70.5,110.05 | 71.5,73.05 71.5,68.55 74,68.55 74,73.05 | 71.86,111.19 79.36,111.19 79.5,111.05 79.5,108.55 75.5,108.55 | 75.5,108.55 72.66,108.55 | 75.5,108.55 77,110.05 | 77,110.05 77.5,110.05 | 74,109.05 75,110.05 | 73.38,105.05 77,108.67 77,110.05
N$7
  Bottom 2.54: 41,65.52 R1.2 43.26,55.31 41.25,53.3 | 41,65.52 39.02,65.52 C4.1 | 41.25,53.3 39.5,51.55 | 41,65.52 41.25,65.27 41.25,53.3
N$8  (1 unrouted)
  Bottom 2.54: J4.P$2 26.3,14.85 27.5,16.05 | 27.5,16.05 29.97,18.52 F1.1 29.97,21.02 30,21.05 30,17.58 29.97,17.55 29.97,3.3 22.5,3.3 22.5,14.05 29.5,21.05 | 27.5,16.05 28,15.55 28,4.55 24.5,4.55 24.5,14.55 26,14.55 26.5,14.05 26.5,5.55
N$9
  Bottom 2.54: J6.1 104.15,99.14 95.26,108.03 Q1.S
N$10
  Bottom 1.016: J3.P$1 83.72,7.55 92.5,7.55 92.5,20.82
  Bottom 2.54: C6.+ C10.+ C8.+ 94.81,80.57 95.5,80.57 | C6.+ 94.81,30.03 92.53,28.24 | 92.53,28.24 89.53,25.24 89.53,26.17 R2.1 | 92.53,28.24 C12.1 83.72,12.07 J3.P$2 J3.P$1 | D1.C 102.69,106.44 109.48,99.65 109.48,89.05 | 109.48,89.05 109.48,84.55 | 109.48,84.55 109.48,80.57 95.5,80.57 | J3.P$1 81.83,8.22 81.5,8.55 81.5,16.05 85.5,20.05 85.5,28.55 94.81,37.86 C6.+ | 113.5,80.55 108,80.55 | 109.48,84.55 113.5,84.55 113.5,82.05 | J3.P$1 95.5,20.01 95.5,80.57 | 109.48,89.05 112.48,86.05 113,86.05
  Bottom 5: 93,80.05 93,80.55 113.5,80.55 113.5,84.55 113.5,85.05 111,85.05
  Bottom 6: J3.P$2 92.5,20.82 | 92.23,20.55 93,20.55 93,32.05 | 93,32.05 89,27.55 89,18.88 84,13.05 84,11.05 | 93,32.05 93,80.05
N$11
  Bottom 2.54: J7.1 92.97,99.14 84.08,108.03 Q1.G
N$12  (via drill 1 pad 2.5)
  Bottom 2.54: v78.57,62.72 v78.57,57.64 v78.57,52.56
N$13  (via drill 0.8 pad 2)
  Top 1.016: v87.64,92.79 v114.09,92.79
  Bottom 2.54: L2.8 L2.7 L2.2 80.64,32.24 | 87.64,95.84 v87.64,92.79 | v114.09,92.79 113.83,92.54 | v114.09,92.79 113.66,93.21 117.5,97.05 | 117.5,97.05 117.5,107.44 D2.C | v114.09,92.79 114.33,92.55 116.5,92.55 | 116.5,92.55 117.5,92.55 117.5,97.05 | 116.5,92.55 116,93.05 116,94.05 | v114.09,92.79 113.8,93.08 113.8,95.33 | 80.64,32.24 79.47,31.08 | 79.47,31.08 78.44,30.05 76.5,30.05 | 79.47,31.08 79.47,23.05 79.5,23.05 | v87.64,92.79 86.2,91.35 | 86.2,91.35 83.5,88.65 83.5,35.11 | 80.64,32.24 83.5,35.11 | 86.2,91.35 86.2,89.25 84,87.05 86.5,84.55 | 83.5,35.11 86.5,38.11 86.5,84.55 | 86.5,88.05 86.5,84.55 | v87.64,92.79 87.64,84.69 87,84.05 85.5,84.05 85,83.55 85,38.05
N$14
  Bottom 2.54: J8.1 98.56,99.14 89.67,108.03 Q1.D
N$15  (4 unrouted)
  Bottom 1.016: 55.14,77.08 55.14,75.19 55,75.05 | 56.34,74.71 56,75.05 56,76.05
  Bottom 2.54: L2.P$3 L2.P$2 46,47.48 | L2.P$3 L2.11 L2.13 | 53.17,53.07 L2.P$3 | 46,47.48 43.51,47.48 R1.1 49.45,53.93 49.45,58.55 | 35.82,89.74 C14.+ 18.19,89.74 17.5,89.05 | 35.82,89.74 53.67,89.74 | 53.67,89.74 C3.+ | L2.13 53.67,72.05 | 53.67,72.05 53.67,86.55 57,85.05 59.5,83.05 56.5,80.05 59,86.05 56,86.55 54.5,76.55 55.14,77.08 60.5,81.55 60.5,88.05 53.67,88.05 53.67,89.74 | 35.34,82.05 35.34,79.05 35.34,76.05 35,76.05 29.5,81.55 | 35.34,82.05 35.34,89.26 35.82,89.74 | 17.5,89.05 17.5,82.55 18,82.05 35.34,82.05 | L2.13 49,62.55 49,67.55 52,67.55 | 48.77,67.78 46.5,70.05 | C3.+ 58.74,90.05 | 53.67,72.05 56.34,74.71 62,80.38 62,90.05 | 35.34,71.55 B1.+ 35.75,69.55 48.5,69.55 | 35.34,71.55 35.34,75.74 36.25,76.64 | 35.5,69.55 36,70.05 36.5,69.55 | 49.5,81.05 49.5,71.55 35.34,71.55 | 17.5,89.05 17.5,91.05 57.74,91.05 | C3.+ 59.74,91.05 | 59.74,91.05 62,91.05 62,90.05 | 62,90.05 58.74,90.05 | 58.74,90.05 57.74,91.05 | 59.74,91.05 57.74,91.05 | 46,47.48 46,48.05 48,50.05
  Bottom 6: 35.34,79.05 51,79.05 | 51,79.05 51,86.55 38.61,86.55 38.61,83.55 47,82.05 | 51,79.05 51,71.05 | 37.5,75.05 47,74.55 45.11,74.55 38.61,81.05 38.61,80.55
N$16  (via drill 0.8 pad 2)
  Top 1.016: v83.07,101.17 113.05,101.17
N$17  (1 unrouted)
  Bottom 2.54: 120.21,41.05 C11.- C9.- 120.21,85.81 122.71,88.31 122.71,107.81 120.71,109.81 D2.A 120.46,110.05 122.62,110.05 | 120.21,41.05 C7.- | C7.- 120.21,37.05 | 120.21,37.05 120.21,30.54 | 120.7,30.05 122.5,28.25 | 122.5,28.25 123.77,26.98 125,26.98 124.5,26.48 124.5,12.55 122.5,12.55 | 122.5,28.25 C13.2 123.83,19.55 122,19.55 122,16.41 | 122,16.41 J10.P$1 J10.P$2 | J10.P$2 121.19,12.03 122.5,13.34 122.5,12.55 | 120.21,37.05 121,37.05 | 121,37.05 122.71,37.05 124.36,35.41 | 124.36,35.41 126.21,33.55 | 126.21,19.55 126.21,33.55 | 126.21,19.55 126.21,10.55 | 126.21,10.55 121.5,10.55 120.21,11.84 120.21,20.98 | 122.5,12.55 122,13.05 122,16.41 | 121,37.05 124,34.05 | 124,34.05 125,33.05 125,27.55 121,27.55 121,34.05 | 126.21,19.55 125.5,20.26 125.5,28.55 122,32.05 122,34.05 124,34.05 | 124,34.05 123.5,33.55 123.5,31.55 122,30.05 120.7,30.05 | 120.7,30.05 120.21,30.54 | 126.12,106.55 124,106.55 124,90.02 124.21,89.81 | 126.12,106.55 126.25,106.55 | 126.25,106.55 126.25,37.04 124.5,35.3 124.5,35.55 | C7.- 123.38,39.17 124.5,38.05 | 124.5,38.05 124.5,35.55 | 124.5,35.55 124.36,35.41 | 120.21,41.05 122.5,41.05 | 122.5,41.05 125.5,41.05 | 122.5,41.05 122.5,87.55 125.5,87.55 | 124.5,38.05 124.5,39.05 | 124.5,39.05 124.5,90.55 | 126.21,10.55 126.21,7.24 122.36,3.38 111.25,3.38 111.25,12.05 111.27,12.03 | J10.P$2 111.27,12.03 | 111.27,12.03 120.21,20.98 | 120.21,20.98 120.21,30.54 | 122.62,110.05 126.12,106.55 | 124.5,39.05 126.21,37.34 126.21,33.55 | 126.25,106.55 122.75,110.05 122.62,110.05
N$18  (via drill 1 pad 2.5)
  Bottom 2.54: v78.57,37.32 v78.57,42.4 v78.57,47.48
N$19  (via drill 0.8 pad 2)
  Top 1.016: 113.84,95.33 v87.64,95.33
N$20  (via drill 1 pad 2.5)
  Bottom 2.54: v78.57,32.24 v78.57,27.16 v78.57,22.08 80.5,22.08 80.5,32.05
N$21  (via drill 0.8 pad 2)
  Bottom 2.54: v113.05,101.17 113.05,105.5 113,105.55
N$22  (via drill 0.8 pad 2)
  Bottom 2.54: v114.09,95.33 115.78,95.33 117.5,97.05 117.5,105.05
N$23  (via drill 1 pad 2.5)
  other vias: 49.1,37.32
N$24  (via drill 1 pad 2.5)
  other vias: 49.1,42.4
N$25  (via drill 0.8 pad 2)
  Top 1.016: v113.05,103.71 v83.07,103.71
  Bottom 2.54: L2.10 L2.12 L2.14 76.79,62.72 78.89,64.82 78.89,90.55 | D1.A 107.77,111.01 113.05,105.74 v113.05,103.71 | 83.07,96.85 v83.07,103.71 79.28,103.71 | 78.89,101.03 83.07,96.85 | 78.89,90.55 78.89,94.05 | 78.89,94.05 78.89,101.03 | 78.89,101.03 78.89,103.32 79.28,103.71 | 81.28,99.38 80.54,100.12 80.54,102.45 79.28,103.71 | 83.07,96.85 83.07,94.73 78.89,90.55 | 78.89,94.05 81,96.16 81,97.55
N$26  (via drill 1 pad 2.5)
  Bottom 2.54: v49.1,62.72 v49.1,57.64 v49.1,52.56 v49.1,47.48
N$27
  Bottom 2.54: 74.5,22.08 77.97,22.08 | 77.97,22.08 78,22.05 | 77.97,22.08 76.5,23.55 76.5,31.55
N$28
  Bottom 2.54: 78.5,64.55 78.5,62.05
N$29
  Bottom 2.54: 74,52.55 78.5,52.55 77,54.05 76,54.05 76,56.05 76.5,56.55 | 76.5,56.55 76.5,55.05 | 76.5,56.55 76.5,61.55
N$30
  Bottom 2.54: 74,47.55 78.5,47.55 77,46.05 76.5,46.05 76.5,37.55 | 76.5,37.55 78,37.55 | 76.5,37.55 74.5,37.55
N$31
  Bottom 2.54: 51.5,60.05 51.5,60.55 53.5,62.55 49.5,62.55 51.5,63.55 51.5,66.05 | 50.5,61.05 51.5,60.05 | 51.5,60.05 51.5,48.55
N$32
  Bottom 2.54: 49,42.55 54.5,42.55
N$33  (via drill 1 pad 2.5)
  other vias: 49.1,22.08
N$34  (via drill 1 pad 2.5)
  other vias: 49.1,27.16
N$35
  Bottom 1.016: D5.A 40.5,7.05 40,7.55 40,13.05 | 40,13.05 40,25.05 42.11,27.16 L2.3 | D6.C 40,13.05
N$36  (via drill 1 pad 2.5)
  other vias: 49.1,32.24
N$37
  Bottom 2.54: 146.83,34.39 C17.1 141.97,29.53 F2.2 | L3.4 146.83,34.39 | 146.83,40.35 L3.4 | 146.83,34.39 146.83,22.55 | 146.83,22.55 146.83,21.38 | 146.83,21.38 143.82,18.37 137.68,18.37 137.68,42.05 146.83,42.05 | L3.4 146.83,42.05 | 146.83,42.05 151,42.05 151,26.55 | 146.83,21.38 148,22.55 | 151,26.55 148,23.55 148,22.55 | 146.83,22.55 148,22.55 | 148,22.55 151,25.55 151,26.55
N$38  (1 unrouted)
  Bottom 1.016: 151.01,50.07 153.5,52.56 153.5,71.55 149,71.55 149,68.05 145.5,64.55 145,64.55
  Bottom 2.54: L3.3 146.83,61.29 | 146.83,64.06 146.83,61.29 | C23.1 146.83,61.29 | B2.AC2 152.34,69.58 150.83,68.07
  Bottom 5: 151.01,50.07 151.5,50.56 151.5,57.05 | 151,61.55 151,69.55 | 146.83,61.29 146.83,62.88 149.5,65.55
  Bottom 6: 143.52,50.09 L3.3 151.01,50.07 | 143.52,50.09 139.5,50.05 139.5,62.05 149.16,62.05 | 143.52,50.09 144.5,58.05 151,61.55 148,53.05 151,51.55
N$39
  Bottom 1.016: D4.C D5.C 57.96,7.05 | C15.+ 57.96,9.01 57.96,7.05 | 57.96,7.05 R4.2
N$40
  Bottom 1.016: D6.A D3.A 54.58,18.05 67.5,18.05 C16.- 73,12.55 73,7.51 R5.2
N$41
  Bottom 1.016: D4.A 44,10.05 45,11.05 45,16.05 | 45,16.05 D3.C | L2.6 46.5,22.08 45,20.58 45,16.05
N$42
  Bottom 2.54: J11.P$1 J11.P$2 145.91,13.46 151,18.55 | 159.91,29.56 C17.2 | L3.1 159.78,27.33 156,23.55 | 151,18.55 156,23.55 | J11.P$1 151,3.39 151,15.95 | 151,15.95 151,18.55 | J11.P$1 141.5,3.39 | 141.5,3.39 141.5,4.55 140.21,4.55 | 147,13.16 137.68,13.16 137.68,7.05 138.5,6.24 138.53,6.24 140.21,4.55 | C17.2 151,15.95 | C17.2 164.61,41.94 164.5,42.05 156,42.05 156,23.55 | 141.5,3.39 141.37,3.39 140.21,4.55
N$43
  Bottom 2.54: B2.AC1 159.84,66.06 | 159.84,66.06 159.84,61.55 | 159.84,61.55 159.84,50.18 L3.2 | C23.2 160.09,61.29 159.84,61.55 | C23.2 160.67,65.23 | 159.84,66.06 160.67,65.23 | 160.67,65.23 160.67,70.82 159,70.82 159,48.34 164.61,48.34 C23.2
N$44  (1 unrouted)
  Bottom 2.54: L4.P$1 192.24,37.32 198.97,44.06 | 198.79,75.5 198.79,73.5 198.97,73.69 J14.1 198.97,46.55 | 198.97,46.55 198.97,44.06 | C25.2 178.6,38.95 | 178.6,38.95 180.47,37.08 180.47,37.05 | L4.1 L4.P$1 | L4.P$1 181.01,37.32 180.73,37.05 | 178.6,38.95 178.6,32.21 188.37,32.21 | L4.5 193.5,42.4 193.5,45.05 | 198.79,75.5 193.5,70.22 193.5,45.05 | 198.79,75.5 198.79,75.55 201,75.55 201,46.55 | 201,46.55 198.97,46.55 | 198.97,44.06 199.01,44.06 201,46.05 201,46.55 | L4.5 L4.P$1 | L4.5 190.85,42.4 193.5,45.05
N$45
  Bottom 1.016: 208.5,108.55 209,109.05 | 144.85,81.55 149,77.4 149,77.04 | 149,76.55 149,76.54 | 145.61,77.04 146.5,77.93 | 146.12,79.55 146.12,79.43 146.5,79.05 146.5,77.93 | 146.5,77.93 147,78.43 147,78.55 | 144.85,73.55 148.34,77.04 149,77.04 | 149,77.04 149,76.55 | 149,76.55 145.5,73.05 144.85,73.05 | 147.11,77.04 146.61,76.54 146.12,76.05
  Bottom 2.54: 149.85,99.9 C22.- C24.- 203.5,99.9 | 144.85,76.28 144.85,73.55 144.85,73.05 B2.- 137.74,69.95 137.74,106.79 142.14,111.19 203.5,111.19 | 144.85,76.28 144.85,81.55 144.85,96.78 147.97,99.9 149.85,99.9 | 144.85,76.28 145.61,77.04 147.11,77.04 | 146.61,76.54 149,76.54 162.44,76.54 165.23,73.75 165.23,68.32 169.07,64.48 169.07,39.34 171.07,37.34 C26.1 | J13.1 207.97,98.58 206.64,99.9 | 206.64,99.9 203.5,99.9 | 204.5,108.55 206.64,106.41 206.64,99.9 | 203.5,99.9 203.5,96.55 | 203.5,96.55 203.5,80.55 206,77.55 206,73.05 | 208.5,73.05 206,73.05 | 208.5,73.05 208.5,108.55 | 208.5,109.05 206.36,111.19 | 208.5,109.05 207.88,108.43 207.88,107.83 | 207.88,101.43 207.88,105.05 | 207.88,105.05 207.88,107.83 | 207.88,107.83 207.16,108.55 | 205.88,109.33 206.16,109.05 206.5,109.05 206.62,108.93 206.78,108.93 207.16,108.55 | 203.5,111.19 206.36,111.19 | 203.5,96.55 205.5,97.05 206.5,97.55 205.5,92.05 206,79.55 | 203.5,96.55 205.5,95.05 205.5,95.67 | 149.85,99.9 143,93.05 | 203.5,111.19 204.5,110.19 204.5,110.05 205,110.05 | 206,73.05 206,68.55 208.5,68.55 208.5,73.05 | 206.36,111.19 213.86,111.19 214,111.05 214,108.55 210,108.55 | 210,108.55 207.16,108.55 | 210,108.55 211.5,110.05 | 211.5,110.05 212,110.05 | 208.5,109.05 209.5,110.05 | 207.88,105.05 211.5,108.67 211.5,110.05
N$46
  Bottom 2.54: 175.5,65.52 R6.2 177.76,55.31 175.75,53.3 | 175.5,65.52 173.52,65.52 C25.1 | 175.75,53.3 174,51.55 | 175.5,65.52 175.75,65.27 175.75,53.3
N$47
  Bottom 1.016: J18.P$1 218.22,7.55 227,7.55 227,20.82
  Bottom 2.54: C27.+ C18.+ C29.+ 229.31,80.57 230,80.57 | C27.+ 229.31,30.03 227.03,28.24 | 227.03,28.24 224.03,25.24 224.03,26.17 R7.1 | 227.03,28.24 C20.1 218.22,12.07 J18.P$2 J18.P$1 | D7.C 237.19,106.44 243.98,99.65 243.98,89.05 | 243.98,89.05 243.98,84.55 | 243.98,84.55 243.98,80.57 230,80.57 | J18.P$1 216.33,8.22 216,8.55 216,16.05 220,20.05 220,28.55 229.31,37.86 C27.+ | 248,80.55 242.5,80.55 | 243.98,84.55 248,84.55 248,82.05 | J18.P$1 230,20.01 230,80.57 | 243.98,89.05 246.98,86.05 247.5,86.05
  Bottom 5: 227.5,80.05 227.5,80.55 248,80.55 248,84.55 248,85.05 245.5,85.05
  Bottom 6: J18.P$2 227,20.82 | 226.73,20.55 227.5,20.55 227.5,32.05 | 227.5,32.05 223.5,27.55 223.5,18.88 218.5,13.05 218.5,11.05 | 227.5,32.05 227.5,80.05
N$48  (via drill 0.8 pad 2)
  Top 1.016: v222.14,92.79 v248.59,92.79
  Bottom 2.54: L4.8 L4.7 L4.2 215.14,32.24 | 222.14,95.84 v222.14,92.79 | v248.59,92.79 248.33,92.54 | v248.59,92.79 248.16,93.21 252,97.05 | 252,97.05 252,107.44 D8.C | v248.59,92.79 248.83,92.55 251,92.55 | 251,92.55 252,92.55 252,97.05 | 251,92.55 250.5,93.05 250.5,94.05 | v248.59,92.79 248.3,93.08 248.3,95.33 | 215.14,32.24 213.97,31.08 | 213.97,31.08 212.94,30.05 211,30.05 | 213.97,31.08 213.97,23.05 214,23.05 | v222.14,92.79 220.7,91.35 | 220.7,91.35 218,88.65 218,35.11 | 215.14,32.24 218,35.11 | 220.7,91.35 220.7,89.25 218.5,87.05 221,84.55 | 218,35.11 221,38.11 221,84.55 | 221,88.05 221,84.55 | v222.14,92.79 222.14,84.69 221.5,84.05 220,84.05 219.5,83.55 219.5,38.05
N$49  (via drill 0.8 pad 2)
  Top 1.016: v247.55,103.71 v217.57,103.71
  Bottom 2.54: L4.10 L4.12 L4.14 211.29,62.72 213.39,64.82 213.39,90.55 | D7.A 242.27,111.01 247.55,105.74 v247.55,103.71 | 217.57,96.85 v217.57,103.71 213.78,103.71 | 213.39,101.03 217.57,96.85 | 213.39,90.55 213.39,94.05 | 213.39,94.05 213.39,101.03 | 213.39,101.03 213.39,103.32 213.78,103.71 | 215.78,99.38 215.04,100.12 215.04,102.45 213.78,103.71 | 217.57,96.85 217.57,94.73 213.39,90.55 | 213.39,94.05 215.5,96.16 215.5,97.55
N$50  (1 unrouted)
  Bottom 2.54: J12.P$2 160.8,14.85 162,16.05 | 162,16.05 164.47,18.52 F2.1 164.47,21.02 164.5,21.05 164.5,17.58 164.47,17.55 164.47,3.3 157,3.3 157,14.05 164,21.05 | 162,16.05 162.5,15.55 162.5,4.55 159,4.55 159,14.55 160.5,14.55 161,14.05 161,5.55
N$51  (4 unrouted)
  Bottom 1.016: 189.64,77.08 189.64,75.19 189.5,75.05 | 190.84,74.71 190.5,75.05 190.5,76.05
  Bottom 2.54: L4.P$3 L4.P$2 180.5,47.48 | L4.P$3 L4.11 L4.13 | 187.67,53.07 L4.P$3 | 180.5,47.48 178.01,47.48 R6.1 183.95,53.93 183.95,58.55 | 170.32,89.74 C22.+ 152.69,89.74 152,89.05 | 170.32,89.74 188.17,89.74 | 188.17,89.74 C24.+ | L4.13 188.17,72.05 | 188.17,72.05 188.17,86.55 191.5,85.05 194,83.05 191,80.05 193.5,86.05 190.5,86.55 189,76.55 189.64,77.08 195,81.55 195,88.05 188.17,88.05 188.17,89.74 | 169.84,82.05 169.84,79.05 169.84,76.05 169.5,76.05 164,81.55 | 169.84,82.05 169.84,89.26 170.32,89.74 | 152,89.05 152,82.55 152.5,82.05 169.84,82.05 | L4.13 183.5,62.55 183.5,67.55 186.5,67.55 | 183.27,67.78 181,70.05 | C24.+ 193.24,90.05 | 188.17,72.05 190.84,74.71 196.5,80.38 196.5,90.05 | 169.84,71.55 B2.+ 170.25,69.55 183,69.55 | 169.84,71.55 169.84,75.74 170.75,76.64 | 170,69.55 170.5,70.05 171,69.55 | 184,81.05 184,71.55 169.84,71.55 | 152,89.05 152,91.05 192.24,91.05 | C24.+ 194.24,91.05 | 194.24,91.05 196.5,91.05 196.5,90.05 | 196.5,90.05 193.24,90.05 | 193.24,90.05 192.24,91.05 | 194.24,91.05 192.24,91.05 | 180.5,47.48 180.5,48.05 182.5,50.05
  Bottom 6: 169.84,79.05 185.5,79.05 | 185.5,79.05 185.5,86.55 173.11,86.55 173.11,83.55 181.5,82.05 | 185.5,79.05 185.5,71.05 | 172,75.05 181.5,74.55 179.61,74.55 173.11,81.05 173.11,80.55
N$52
  Bottom 2.54: J15.1 238.65,99.14 229.76,108.03 Q2.S
N$53
  Bottom 2.54: J16.1 227.47,99.14 218.58,108.03 Q2.G
N$54
  Bottom 2.54: J17.1 233.06,99.14 224.17,108.03 Q2.D
N$55  (1 unrouted)
  Bottom 2.54: 254.71,41.05 C19.- C30.- 254.71,85.81 257.21,88.31 257.21,107.81 255.21,109.81 D8.A 254.96,110.05 257.12,110.05 | 254.71,41.05 C28.- | C28.- 254.71,37.05 | 254.71,37.05 254.71,30.54 | 255.2,30.05 257,28.25 | 257,28.25 258.27,26.98 259.5,26.98 259,26.48 259,12.55 257,12.55 | 257,28.25 C21.2 258.33,19.55 256.5,19.55 256.5,16.41 | 256.5,16.41 J20.P$1 J20.P$2 | J20.P$2 255.69,12.03 257,13.34 257,12.55 | 254.71,37.05 255.5,37.05 | 255.5,37.05 257.21,37.05 258.86,35.41 | 258.86,35.41 260.71,33.55 | 260.71,19.55 260.71,33.55 | 260.71,19.55 260.71,10.55 | 260.71,10.55 256,10.55 254.71,11.84 254.71,20.98 | 257,12.55 256.5,13.05 256.5,16.41 | 255.5,37.05 258.5,34.05 | 258.5,34.05 259.5,33.05 259.5,27.55 255.5,27.55 255.5,34.05 | 260.71,19.55 260,20.26 260,28.55 256.5,32.05 256.5,34.05 258.5,34.05 | 258.5,34.05 258,33.55 258,31.55 256.5,30.05 255.2,30.05 | 255.2,30.05 254.71,30.54 | 260.62,106.55 258.5,106.55 258.5,90.02 258.71,89.81 | 260.62,106.55 260.75,106.55 | 260.75,106.55 260.75,37.04 259,35.3 259,35.55 | C28.- 257.88,39.17 259,38.05 | 259,38.05 259,35.55 | 259,35.55 258.86,35.41 | 254.71,41.05 257,41.05 | 257,41.05 260,41.05 | 257,41.05 257,87.55 260,87.55 | 259,38.05 259,39.05 | 259,39.05 259,90.55 | 260.71,10.55 260.71,7.24 256.86,3.38 245.75,3.38 245.75,12.05 245.77,12.03 | J20.P$2 245.77,12.03 | 245.77,12.03 254.71,20.98 | 254.71,20.98 254.71,30.54 | 257.12,110.05 260.62,106.55 | 259,39.05 260.71,37.34 260.71,33.55 | 260.75,106.55 257.25,110.05 257.12,110.05
N$56  (via drill 0.8 pad 2)
  Top 1.016: v217.57,101.17 247.55,101.17
N$57  (via drill 0.8 pad 2)
  Top 1.016: 248.34,95.33 v222.14,95.33
N$58  (via drill 0.8 pad 2)
  Bottom 2.54: v247.55,101.17 247.55,105.5 247.5,105.55
N$59  (via drill 0.8 pad 2)
  Bottom 2.54: v248.59,95.33 250.28,95.33 252,97.05 252,105.05
N$60  (via drill 1 pad 2.5)
  Bottom 2.54: v213.07,62.72 v213.07,57.64 v213.07,52.56
N$61  (via drill 1 pad 2.5)
  Bottom 2.54: v213.07,37.32 v213.07,42.4 v213.07,47.48
N$62  (via drill 1 pad 2.5)
  Bottom 2.54: v213.07,32.24 v213.07,27.16 v213.07,22.08 215,22.08 215,32.05
N$63  (via drill 1 pad 2.5)
  other vias: 183.6,22.08
N$64  (via drill 1 pad 2.5)
  other vias: 183.6,27.16
N$65  (via drill 1 pad 2.5)
  other vias: 183.6,32.24
N$66  (via drill 1 pad 2.5)
  other vias: 183.6,37.32
N$67  (via drill 1 pad 2.5)
  other vias: 183.6,42.4
N$68  (via drill 1 pad 2.5)
  Bottom 2.54: v183.6,62.72 v183.6,57.64 v183.6,52.56 v183.6,47.48
N$69
  Bottom 2.54: 209,22.08 212.47,22.08 | 212.47,22.08 212.5,22.05 | 212.47,22.08 211,23.55 211,31.55
N$70
  Bottom 2.54: 213,64.55 213,62.05
N$71
  Bottom 2.54: 208.5,52.55 213,52.55 211.5,54.05 210.5,54.05 210.5,56.05 211,56.55 | 211,56.55 211,55.05 | 211,56.55 211,61.55
N$72
  Bottom 2.54: 208.5,47.55 213,47.55 211.5,46.05 211,46.05 211,37.55 | 211,37.55 212.5,37.55 | 211,37.55 209,37.55
N$73
  Bottom 2.54: 186,60.05 186,60.55 188,62.55 184,62.55 186,63.55 186,66.05 | 185,61.05 186,60.05 | 186,60.05 186,48.55
N$74
  Bottom 2.54: 183.5,42.55 189,42.55
N$75
  Bottom 1.016: D11.A 175,7.05 174.5,7.55 174.5,13.05 | 174.5,13.05 174.5,25.05 176.61,27.16 L4.3 | D12.C 174.5,13.05
N$76
  Bottom 1.016: D10.C D11.C 192.46,7.05 | C31.+ 192.46,9.01 192.46,7.05 | 192.46,7.05 R9.2
N$77
  Bottom 1.016: D12.A D9.A 189.08,18.05 202,18.05 C32.- 207.5,12.55 207.5,7.51 R10.2
N$78
  Bottom 1.016: D10.A 178.5,10.05 179.5,11.05 179.5,16.05 | 179.5,16.05 D9.C | L4.6 181,22.08 179.5,20.58 179.5,16.05
N$79
  Bottom 2.54: 12.33,154.39 C33.1 7.47,149.53 F3.2 | L5.4 12.33,154.39 | 12.33,160.35 L5.4 | 12.33,154.39 12.33,142.55 | 12.33,142.55 12.33,141.38 | 12.33,141.38 9.32,138.37 3.18,138.37 3.18,162.05 12.33,162.05 | L5.4 12.33,162.05 | 12.33,162.05 16.5,162.05 16.5,146.55 | 12.33,141.38 13.5,142.55 | 16.5,146.55 13.5,143.55 13.5,142.55 | 12.33,142.55 13.5,142.55 | 13.5,142.55 16.5,145.55 16.5,146.55
N$80  (1 unrouted)
  Bottom 1.016: 16.52,170.07 19,172.56 19,191.55 14.5,191.55 14.5,188.05 11,184.55 10.5,184.55
  Bottom 2.54: L5.3 12.33,181.29 | 12.33,184.06 12.33,181.29 | C39.1 12.33,181.29 | B3.AC2 17.84,189.58 16.33,188.07
  Bottom 5: 16.52,170.07 17,170.56 17,177.05 | 16.5,181.55 16.5,189.55 | 12.33,181.29 12.33,182.88 15,185.55
  Bottom 6: 9.02,170.09 L5.3 16.52,170.07 | 9.02,170.09 5,170.05 5,182.05 14.66,182.05 | 9.02,170.09 10,178.05 16.5,181.55 13.5,173.05 16.5,171.55
N$81
  Bottom 2.54: J21.P$1 J21.P$2 11.41,133.46 16.5,138.55 | 25.41,149.56 C33.2 | L5.1 25.28,147.33 21.5,143.55 | 16.5,138.55 21.5,143.55 | J21.P$1 16.5,123.39 16.5,135.95 | 16.5,135.95 16.5,138.55 | J21.P$1 7,123.39 | 7,123.39 7,124.55 5.71,124.55 | 12.5,133.16 3.18,133.16 3.18,127.05 4,126.24 4.03,126.24 5.71,124.55 | C33.2 16.5,135.95 | C33.2 30.11,161.94 30,162.05 21.5,162.05 21.5,143.55 | 7,123.39 6.87,123.39 5.71,124.55
N$82
  Bottom 2.54: B3.AC1 25.34,186.06 | 25.34,186.06 25.34,181.55 | 25.34,181.55 25.34,170.18 L5.2 | C39.2 25.59,181.29 25.34,181.55 | C39.2 26.17,185.23 | 25.34,186.06 26.17,185.23 | 26.17,185.23 26.17,190.82 24.5,190.82 24.5,168.34 30.11,168.34 C39.2
N$83  (1 unrouted)
  Bottom 2.54: L6.P$1 57.74,157.32 64.47,164.06 | 64.29,195.5 64.29,193.5 64.47,193.69 J24.1 64.47,166.55 | 64.47,166.55 64.47,164.06 | C41.2 44.1,158.95 | 44.1,158.95 45.97,157.08 45.97,157.05 | L6.1 L6.P$1 | L6.P$1 46.51,157.32 46.23,157.05 | 44.1,158.95 44.1,152.21 53.87,152.21 | L6.5 59,162.4 59,165.05 | 64.29,195.5 59,190.22 59,165.05 | 64.29,195.5 64.29,195.55 66.5,195.55 66.5,166.55 | 66.5,166.55 64.47,166.55 | 64.47,164.06 64.51,164.06 66.5,166.05 66.5,166.55 | L6.5 L6.P$1 | L6.5 56.35,162.4 59,165.05
N$84
  Bottom 1.016: 74,228.55 74.5,229.05 | 10.35,201.55 14.5,197.4 14.5,197.04 | 14.5,196.55 14.5,196.54 | 11.11,197.04 12,197.93 | 11.62,199.55 11.62,199.43 12,199.05 12,197.93 | 12,197.93 12.5,198.43 12.5,198.55 | 10.35,193.55 13.84,197.04 14.5,197.04 | 14.5,197.04 14.5,196.55 | 14.5,196.55 11,193.05 10.35,193.05 | 12.61,197.04 12.11,196.54 11.62,196.05
  Bottom 2.54: 15.35,219.9 C38.- C40.- 69,219.9 | 10.35,196.28 10.35,193.55 10.35,193.05 B3.- 3.24,189.95 3.24,226.79 7.64,231.19 69,231.19 | 10.35,196.28 10.35,201.55 10.35,216.78 13.47,219.9 15.35,219.9 | 10.35,196.28 11.11,197.04 12.61,197.04 | 12.11,196.54 14.5,196.54 27.94,196.54 30.73,193.75 30.73,188.32 34.57,184.48 34.57,159.34 36.57,157.34 C42.1 | J23.1 73.47,218.58 72.14,219.9 | 72.14,219.9 69,219.9 | 70,228.55 72.14,226.41 72.14,219.9 | 69,219.9 69,216.55 | 69,216.55 69,200.55 71.5,197.55 71.5,193.05 | 74,193.05 71.5,193.05 | 74,193.05 74,228.55 | 74,229.05 71.86,231.19 | 74,229.05 73.38,228.43 73.38,227.83 | 73.38,221.43 73.38,225.05 | 73.38,225.05 73.38,227.83 | 73.38,227.83 72.66,228.55 | 71.38,229.33 71.66,229.05 72,229.05 72.12,228.93 72.28,228.93 72.66,228.55 | 69,231.19 71.86,231.19 | 69,216.55 71,217.05 72,217.55 71,212.05 71.5,199.55 | 69,216.55 71,215.05 71,215.67 | 15.35,219.9 8.5,213.05 | 69,231.19 70,230.19 70,230.05 70.5,230.05 | 71.5,193.05 71.5,188.55 74,188.55 74,193.05 | 71.86,231.19 79.36,231.19 79.5,231.05 79.5,228.55 75.5,228.55 | 75.5,228.55 72.66,228.55 | 75.5,228.55 77,230.05 | 77,230.05 77.5,230.05 | 74,229.05 75,230.05 | 73.38,225.05 77,228.67 77,230.05
N$85
  Bottom 2.54: 41,185.52 R11.2 43.26,175.31 41.25,173.3 | 41,185.52 39.02,185.52 C41.1 | 41.25,173.3 39.5,171.55 | 41,185.52 41.25,185.27 41.25,173.3
N$86
  Bottom 1.016: J28.P$1 83.72,127.55 92.5,127.55 92.5,140.82
  Bottom 2.54: C43.+ C34.+ C45.+ 94.81,200.57 95.5,200.57 | C43.+ 94.81,150.03 92.53,148.24 | 92.53,148.24 89.53,145.24 89.53,146.17 R12.1 | 92.53,148.24 C36.1 83.72,132.07 J28.P$2 J28.P$1 | D13.C 102.69,226.44 109.48,219.65 109.48,209.05 | 109.48,209.05 109.48,204.55 | 109.48,204.55 109.48,200.57 95.5,200.57 | J28.P$1 81.83,128.22 81.5,128.55 81.5,136.05 85.5,140.05 85.5,148.55 94.81,157.86 C43.+ | 113.5,200.55 108,200.55 | 109.48,204.55 113.5,204.55 113.5,202.05 | J28.P$1 95.5,140.01 95.5,200.57 | 109.48,209.05 112.48,206.05 113,206.05
  Bottom 5: 93,200.05 93,200.55 113.5,200.55 113.5,204.55 113.5,205.05 111,205.05
  Bottom 6: J28.P$2 92.5,140.82 | 92.23,140.55 93,140.55 93,152.05 | 93,152.05 89,147.55 89,138.88 84,133.05 84,131.05 | 93,152.05 93,200.05
N$87  (via drill 0.8 pad 2)
  Top 1.016: v87.64,212.79 v114.09,212.79
  Bottom 2.54: L6.8 L6.7 L6.2 80.64,152.24 | 87.64,215.84 v87.64,212.79 | v114.09,212.79 113.83,212.54 | v114.09,212.79 113.66,213.21 117.5,217.05 | 117.5,217.05 117.5,227.44 D14.C | v114.09,212.79 114.33,212.55 116.5,212.55 | 116.5,212.55 117.5,212.55 117.5,217.05 | 116.5,212.55 116,213.05 116,214.05 | v114.09,212.79 113.8,213.08 113.8,215.33 | 80.64,152.24 79.47,151.08 | 79.47,151.08 78.44,150.05 76.5,150.05 | 79.47,151.08 79.47,143.05 79.5,143.05 | v87.64,212.79 86.2,211.35 | 86.2,211.35 83.5,208.65 83.5,155.11 | 80.64,152.24 83.5,155.11 | 86.2,211.35 86.2,209.25 84,207.05 86.5,204.55 | 83.5,155.11 86.5,158.11 86.5,204.55 | 86.5,208.05 86.5,204.55 | v87.64,212.79 87.64,204.69 87,204.05 85.5,204.05 85,203.55 85,158.05
N$88  (via drill 0.8 pad 2)
  Top 1.016: v113.05,223.71 v83.07,223.71
  Bottom 2.54: L6.10 L6.12 L6.14 76.79,182.72 78.89,184.82 78.89,210.55 | D13.A 107.77,231.01 113.05,225.74 v113.05,223.71 | 83.07,216.85 v83.07,223.71 79.28,223.71 | 78.89,221.03 83.07,216.85 | 78.89,210.55 78.89,214.05 | 78.89,214.05 78.89,221.03 | 78.89,221.03 78.89,223.32 79.28,223.71 | 81.28,219.38 80.54,220.12 80.54,222.45 79.28,223.71 | 83.07,216.85 83.07,214.73 78.89,210.55 | 78.89,214.05 81,216.16 81,217.55
N$89  (1 unrouted)
  Bottom 2.54: J22.P$2 26.3,134.85 27.5,136.05 | 27.5,136.05 29.97,138.52 F3.1 29.97,141.02 30,141.05 30,137.58 29.97,137.55 29.97,123.3 22.5,123.3 22.5,134.05 29.5,141.05 | 27.5,136.05 28,135.55 28,124.55 24.5,124.55 24.5,134.55 26,134.55 26.5,134.05 26.5,125.55
N$90  (4 unrouted)
  Bottom 1.016: 55.14,197.08 55.14,195.19 55,195.05 | 56.34,194.71 56,195.05 56,196.05